# Altium PCB fullCURRENT control.PcbDoc
Units mil, origin at the board's own origin, x right, y up, seen from the top; angles counter-clockwise.
Board outline 1800 x 6000 mil, 2 copper layers (Top Layer, Bottom Layer), stack 62 mil thick; 108 components, 93 nets, 417 pads, 171 vias.
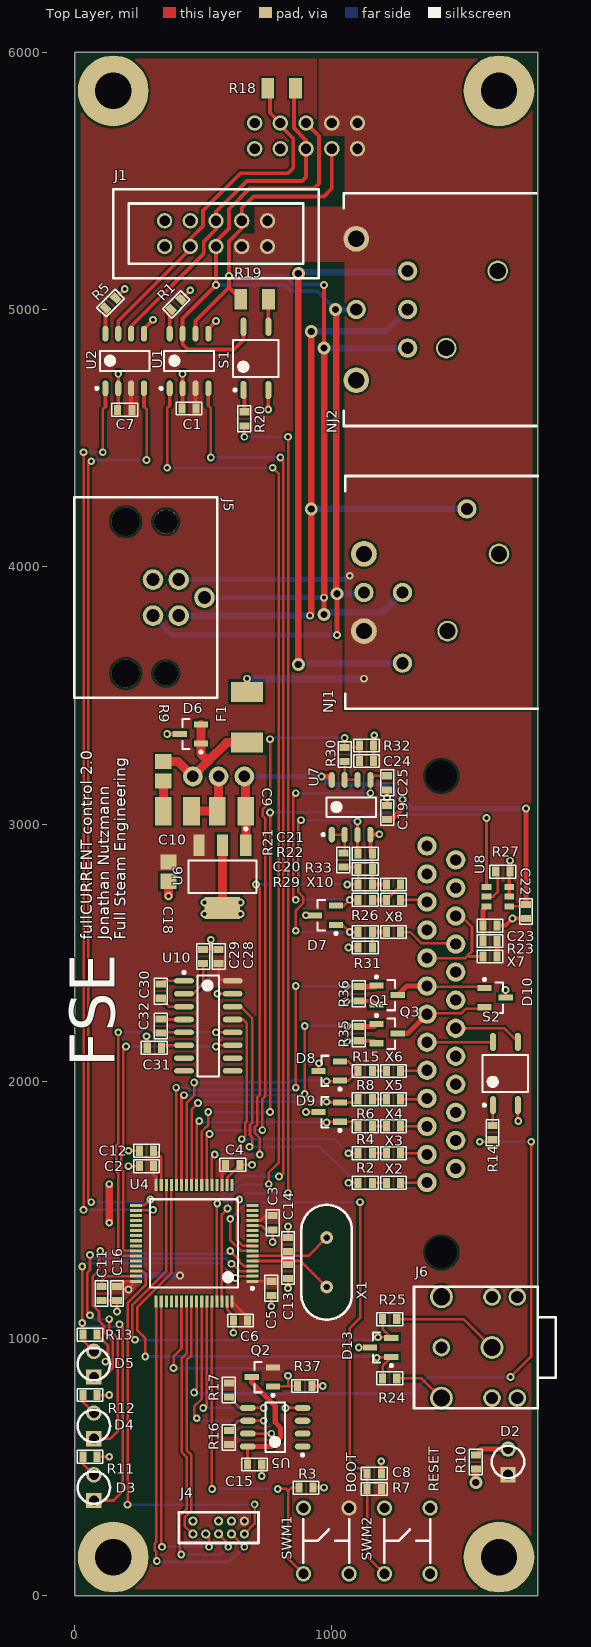
[diagram p0: Top Layer view]
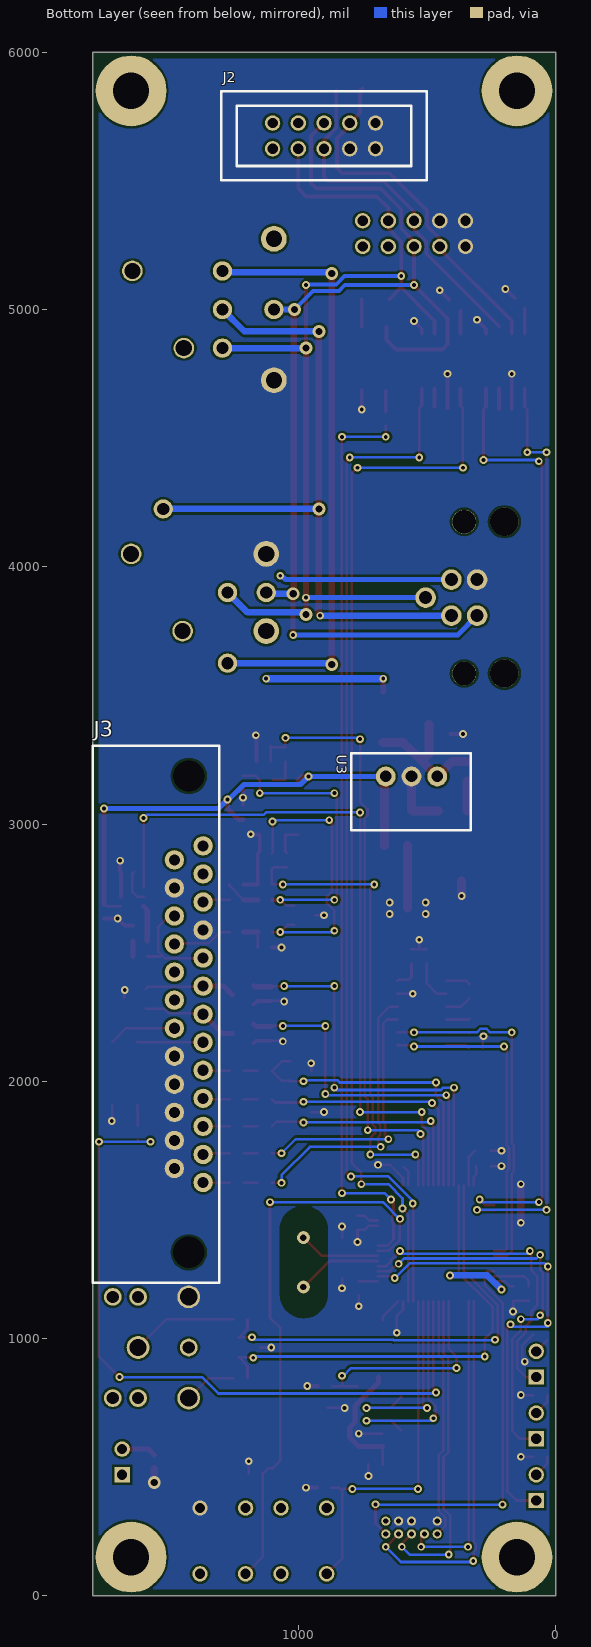
[diagram p1: Bottom Layer view, seen from below]
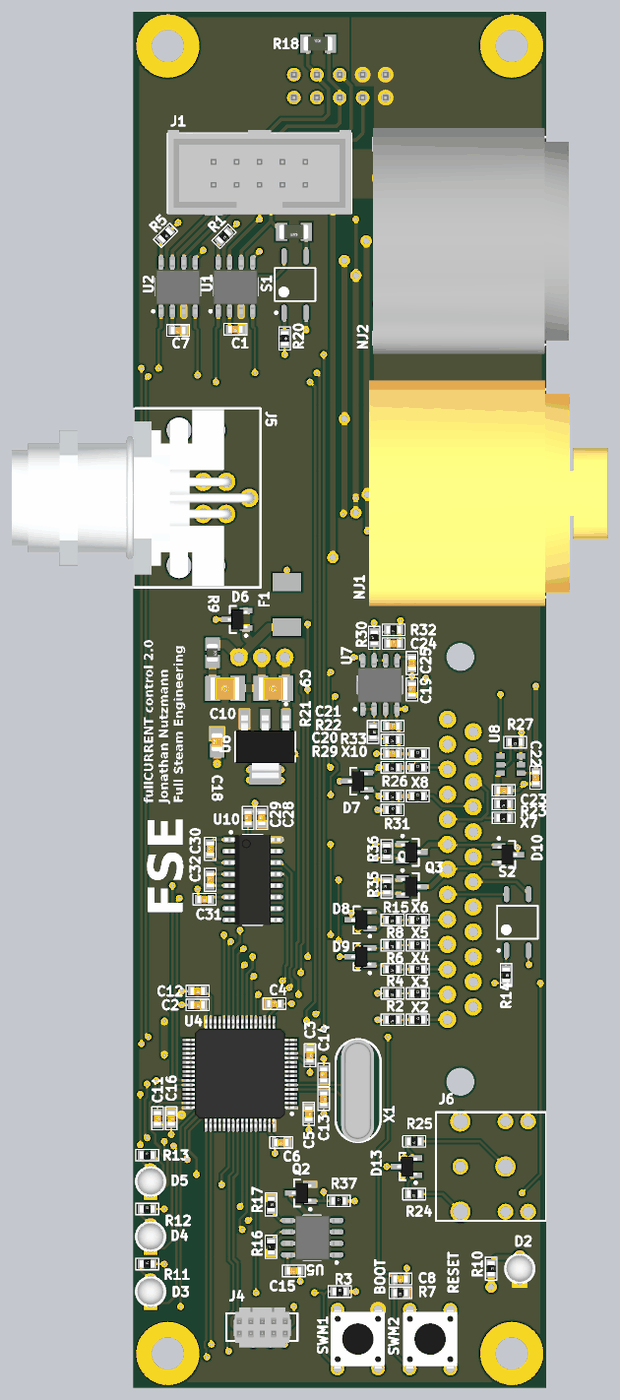
[diagram p2: 3D render of the assembled board from above, using the file's embedded part models]

## Layer stack, top to bottom
Top Layer: signal copper 1.4
Dielectric: core 59.2, FR-4, Dk 4.8
Bottom Layer: signal copper 1.4

## Board outline
0,0 0,6000 1800,6000 1800,0

## Design rules (kind name [scope] priority, off if disabled: settings)
Clearance micro [InComponent('U4')] p1: gap=7
Clearance [All] p2: gap=9
Height [All] p1: minheight=0 maxheight=5000 prefheight=500
HoleSize [All] p1: absolutevalues=TRUE maxlimit=1000 minlimit=1 maxpercent=80.000 minpercent=20.000
MinimumSolderMaskSliver [All] p1: minsoldermaskwidth=3
PolygonConnect vcan [InNet('+VCAN') OR InNet('+3.3V')] p1: connectstyle=Direct reliefconductorwidth=10 reliefentries=4 polygonreliefangle="90 Angle" airgapwidth=10
PolygonConnect [All] p2: connectstyle=Direct reliefconductorwidth=10 reliefentries=4 polygonreliefangle="90 Angle" airgapwidth=10
RoutingVias [All] p1: holewidth=15 width=30 viastyle="Through Hole" minholewidth=15 minwidth=30 maxholewidth=100 maxwidth=50
SilkToSilkClearance [All] p1: silktosilkclearance=0
SilkscreenOverComponentPads [All] p1: minsilkscreentomaskgap=0
SolderMaskExpansion [All] p1: expansion=4
Width [All] p1: maxlimit=1000 minlimit=10 preferedwidth=15
23 further rules are at their usual default settings.

## Components (designator, comment, footprint, x,y, rotation, side; value= is the part's Value field where it differs from the comment)
C1 "CAP 0603" 0603_cap 445,4615 r180 top
C2 "CAP 0603" 0603_cap 280,1670 r180 top
C3 "CAP 0603" 0603_cap 770,1450 r270 top
C4 "CAP 0603" 0603_cap 615,1675 r0 top
C5 "CAP 0603" 0603_cap 765,1195 r270 top
C6 "CAP 0603" 0603_cap 645,1070 r180 top
C7 "CAP 0603" 0603_cap 195,4610 r180 top
C8 "CAP 0603" 0603_cap 1165,475 r180 top
C9 "C_1210_10uF" 1210_Capacitor 610,3050 r0 top
C10 "C_1210_10uF" 1210_Capacitor 400,3050 r0 top
C11 "CAP 0603" 0603_cap 105,1175 r270 top
C12 "CAP 0603" 0603_cap 280,1730 r180 top
C13 "CAP 0603" 0603_cap 830,1260 r270 top
C14 "CAP 0603" 0603_cap 830,1365 r90 top
C15 "CAP 0603" 0603_cap 700,510 r180 top
C16 "CAP 0603" 0603_cap 165,1175 r270 top
C18 "CAP 0805" 0805_Capacitor 365,2815 r90 top
C19 "CAP 0603" 0603_cap 1215,3045 r90 top
C20 "CAP 0603" 0603_cap 1130,2765 r0 top
C21 "CAP 0603" 0603_cap 1130,2885 r0 top
C22 "CAP 0603" 0603_cap 1755,2660 r90 top
C23 "CAP 0603" 0603_cap 1615,2605 r180 top
C24 "CAP 0603" 0603_cap 1135,3245 r0 top
C25 "CAP 0603" 0603_cap 1215,3160 r270 top
C28 "CAP 0603" 0603_cap 560,2485 r90 top
C29 "CAP 0603" 0603_cap 500,2485 r90 top
C30 "CAP 0603" 0603_cap 335,2350 r90 top
C31 "CAP 0603" 0603_cap 310,2130 r180 top
C32 "CAP 0603" 0603_cap 335,2215 r90 top
D2 "3MM GREEN" "LED 3MM GREEN" 1685,520 r90 top
D3 "3MM YELLOW" "LED 3MM BLUE" 75,420 r90 top
D4 "3MM RED" "LED 3MM RED" 75,660 r90 top
D5 "3MM YELLOW" "LED 3MM YELLOW" 75,900 r90 top
D6 "26V" SOT-23 450,3350 r180 top
D7 "5.0V" SOT-23 975,2645 r180 top
D8 "5.0V" SOT-23 990,2040 r180 top
D9 "5.0V" SOT-23 990,1880 r180 top
D10 "26V" SOT-23 1635,2325 r0 top
D13 "3.3V" SOT-23 1190,965 r180 top
F1 "F_2410" 2410 670,3415 r270 top
J1 "J_5x2_0.1" 10PIN_2_.100IN 750,5245 r180 top
J2 "J_5x2_0.1" 10PIN_2_.100IN 1100,5725 r180 bottom
J3 "J_DB25" DB25 1370,2915 r0 bottom locked
J4 "J_CORTEX_DEBUG" CORTEX_DEBUG 660,290 r180 top
J5 "1694224" WFSFDH4.5 355,3880 r270 top
J6 "J_SJ1-3523N" SJ1-3523N 1800,965 r90 top
NJ1 "NC5FBH_D1" NC5FBH 1800,3900 r270 top
NJ2 "NC5MBH_D1" NC5MBH 1795,5000 r270 top
Q1 "Q_IRLML6246TRPBF" SOT-23 1215,2185 r0 top
Q2 "FDN302P" SOT-23 730,850 r180 top
Q3 "Q_IRLML6246TRPBF" SOT-23 1215,2335 r0 top
R1 "RES 0603" 0603_res 395,5020 r225 top
R2 "RES 0603" 0603_res 1130,1605 r180 top
R3 "RES 0603" 0603_res 900,420 r0 top
R4 "RES 0603" 0603_res 1130,1720 r180 top
R5 "RES 0603" 0603_res 140,5025 r225 top
R6 "RES 0603" 0603_res 1130,1825 r180 top
R7 "RES 0603" 0603_res 1165,415 r180 top
R8 "RES 0603" 0603_res 1130,1930 r180 top
R9 "R_0805_1_1%" 0805_Resistor 345,3205 r270 top
R10 "RES 0603" 0603_res 1560,520 r270 top
R11 "RES 0603" 0603_res 60,540 r0 top
R12 "RES 0603" 0603_res 60,780 r0 top
R13 "RES 0603" 0603_res 60,1015 r0 top
R14 "RES 0603" 0603_res 1625,1800 r270 top
R15 "RES 0603" 0603_res 1130,2040 r180 top
R16 "RES 0603" 0603_res 600,615 r90 top
R17 "RES 0603" 0603_res 600,800 r270 top
R18 "RES 1206" 1206_Resistor 805,5860 r0 top
R19 "RES 1206" 1206_Resistor 700,5040 r180 top
R20 "RES 0603" 0603_res 660,4575 r270 top
R21 "RES 0603" 0603_res 1045,2860 r270 top
R22 "RES 0603" 0603_res 1130,2825 r180 top
R23 "RES 0603" 0603_res 1615,2545 r180 top
R24 "RES 0603" 0603_res 1225,845 r180 top
R25 "RES 0603" 0603_res 1225,1075 r180 top
R26 "RES 0603" 0603_res 1130,2580 r180 top
R27 "RES 0603" 0603_res 1665,2815 r180 top
R29 "RES 0603" 0603_res 1130,2705 r180 top
R30 "RES 0603" 0603_res 1050,3270 r90 top
R31 "RES 0603" 0603_res 1130,2520 r0 top
R32 "RES 0603" 0603_res 1135,3305 r180 top
R33 "RES 0603" 0603_res 1240,2765 r0 top
R35 "RES 0603" 0603_res 1105,2185 r90 top
R36 "RES 0603" 0603_res 1105,2340 r90 top
R37 "RES 0603" 0603_res 895,815 r0 top
S1 "S_PS7241E-1A-F3-A" 4SOP-GULL 705,4810 r90 top
S2 "S_PS7241E-1A-F3-A" 4SOP-GULL 1675,2030 r90 top
SWM1 "SW_TACT_SWITCH_6x6" TACT_SWITCH_6x6 890,85 r0 top
SWM2 "SW_TACT_SWITCH_6x6" TACT_SWITCH_6x6 1205,85 r0 top
U1 "U_SN65HVD233D" SOIC127P600X175-8N 445,4800 r90 top
U2 "U_SN65HVD233D" SOIC127P600X175-8N 195,4800 r90 top
U3 "R-783.3-0.5" SIP3 460,3185 r0 bottom
U4 "STM32F405RGT6" STM32_LQFP64 465,1370 r180 top
U5 "MB85RC128PNF-G-JNE1" SOIC127P600X175-8N 780,655 r180 top
U6 "U_MIC2920A-3.3WS" SOT-223 575,2795 r180 top
U7 "IC OP AMP" SOIC127P600X175-8N 1075,3065 r90 top
U8 "NCP380HSNAJAAT1G" tsop-6 1690,2680 r90 top
U10 "U_SN75C3232EDWR" SOIC127P600X175-16N 520,2215 r0 top
X1 "HC49" HC-49 980,1200 r90 top
X2 "0603" 0603_res 1240,1605 r0 top
X3 "0603" 0603_res 1240,1720 r0 top
X4 "0603" 0603_res 1240,1825 r0 top
X5 "0603" 0603_res 1240,1930 r0 top
X6 "0603" 0603_res 1240,2040 r0 top
X7 "0603" 0603_res 1615,2485 r180 top
X8 "0603" 0603_res 1240,2580 r0 top
X10 "0603" 0603_res 1240,2705 r0 top

## Footprints (in the part's own frame and the unit in brackets; to place one, negate y for a bottom-side part, rotate by r counter-clockwise, add the part's x,y. Pads: shape width x height; smd on the part's side, far side on the other; paste and mask are expansions set on the pad)
4SOP-GULL [mm] "SOP, 4-Leads, Body 4.5x4.4mm (max), Pitch 2.45mm, IPC Medium Density"
  oval 1.8x0.6 smd: 1(-3.125,1.225) 2(-3.125,-1.225) 3(3.125,-1.225) 4(3.125,1.225)
  silkscreen extent -3.25,-2.25 1.83,2.25, body extent -2.2,-2.25 2.2,2.25, height 2.1
10PIN_2_.100IN [mil]
  round 60 hole 40.16: 1(0,0) 2(0,-100) 3(100,0) 4(100,-100) 5(200,0) 6(200,-100) 7(300,0) 8(300,-100) 9(400,0) 10(400,-100)
  silkscreen extent -200,-223 600,123, body extent -200,-240 600,133, height 364
0603_cap [mm]
  rect 0.7x1 smd: 1(-0.7,0) 2(0.7,0)
  silkscreen extent -1.27,-0.64 1.27,0.64, body extent -0.8,-0.4 0.8,0.4, height 0.3
0603_res [mm]
  rect 0.7x1 smd: 1(-0.7,0) 2(0.7,0)
  silkscreen extent -1.27,-0.63 1.27,0.63, body extent -0.8,-0.4 0.8,0.4, height 0.3
0805_Capacitor [mm] "0805 Capacitor"
  rect 1.5x1.6 smd: 1(-0.95,0) 2(0.95,0)
  body extent -1,-0.62 1,0.62, height 0.76
0805_Resistor [mm] "0805 Resistor"
  rect 1.5x1.6 smd: 1(-0.95,0) 2(0.95,0)
  body extent -1,-0.62 1,0.63, height 0.78
1206_Resistor [mm] "1206 Resistor/Capacitor"
  rect 1.25x2 smd: 1(-1.375,0) 2(1.375,0)
  body extent -1.6,-0.8 1.6,0.8, height 1
1210_Capacitor [mil] "1210 Capacitor"
  rect 65x110 smd: 1(-55,0) 2(55,0)
  body extent -84,-54 82,52, height 36
2410 [mm]
  rect 2x3.18 smd: 1(-2.5,0) 2(2.5,0)
CORTEX_DEBUG [mm]
  round 0.9 hole 0.5: 1(0,0) 2(0,1.27) 3(1.27,0) 4(1.27,1.27) 5(2.54,0) 6(2.54,1.27) 8(3.81,1.27) 9(5.08,0) 10(5.08,1.27)
  silkscreen extent -1.4,-0.89 6.48,2.16, body extent -0.69,-1.55 5.66,2.9, height 5.85
DB25 [mm]
  round 1.524 hole 3.1 unplated: 0(1.42,-6.9) 0(1.42,40.14)
  round 1.905 hole 1.1: 1(0,33.24) 2(0,30.47) 3(0,27.7) 4(0,24.93) 5(0,22.16) 6(0,19.39) 7(0,16.62) 8(0,13.85) 9(0,11.08) 10(0,8.31) 11(0,5.54) 12(0,2.77) 13(0,0) 14(2.84,31.855) 15(2.84,29.085) 16(2.84,26.315) 17(2.84,23.545) 18(2.84,20.775) 19(2.84,18.005) 20(2.84,15.235) 21(2.84,12.465) 22(2.84,9.695) 23(2.84,6.925) 24(2.84,4.155) 25(2.84,1.385)
  silkscreen extent -1.58,-9.9 10.92,43.14
HC-49 [mm]
  round 1.27 hole 0.635: 1(0,0) 2(4.88,0)
  Top Layer pour cut-out: -2.591,1.499 -2.388,1.727 -2.235,1.854 -1.981,2.057 -1.727,2.184 -1.448,2.311 -1.067,2.388 -0.787,2.413 5.766,2.413 6.172,2.337 6.579,2.21 6.909,2.032 7.239,1.778 7.595,1.372 7.849,0.914 7.976,0.533 8.026,0.127 8.026,-0.178 7.95,-0.559 7.772,-0.991 7.569,-1.346 7.188,-1.778 6.858,-2.007 6.375,-2.235 6.02,-2.311 5.588,-2.362 -0.686,-2.362 -1.016,-2.337 -1.27,-2.286 -1.502,-2.216 -1.753,-2.108 -2.007,-1.981 -2.21,-1.829 -2.438,-1.6 -2.642,-1.346 -2.87,-1.016 -2.997,-0.66 -3.073,-0.279 -3.099,0.025 -3.073,0.33 -3.023,0.584 -2.946,0.889 -2.819,1.118 -2.718,1.295
  Bottom Layer pour cut-out: 7.518,1.499 7.315,1.727 7.163,1.854 6.909,2.057 6.655,2.184 6.375,2.311 5.994,2.388 5.715,2.413 -0.838,2.413 -1.245,2.337 -1.651,2.21 -1.981,2.032 -2.311,1.778 -2.667,1.372 -2.921,0.914 -3.048,0.533 -3.099,0.127 -3.099,-0.178 -3.023,-0.559 -2.845,-0.991 -2.642,-1.346 -2.261,-1.778 -1.93,-2.007 -1.448,-2.235 -1.092,-2.311 -0.66,-2.362 5.613,-2.362 5.944,-2.337 6.198,-2.286 6.43,-2.216 6.68,-2.108 6.934,-1.981 7.137,-1.829 7.366,-1.6 7.569,-1.346 7.798,-1.016 7.925,-0.66 8.001,-0.279 8.026,0.025 8.001,0.33 7.95,0.584 7.874,0.889 7.747,1.118 7.645,1.295
  silkscreen extent -3.23,-2.5 8.11,2.5, body extent -3.25,-1.78 8.1,1.87, height 3.3
"LED 3MM BLUE" [mil] "LED 3MM GREEN"
  rect 59.06x60 hole 39.37: A(-50,0)
  round 60 hole 39.37: K(50,0)
  silkscreen extent -63,-63 63,63, body extent -65,-65 65,65, height 217
"LED 3MM GREEN" [mil] "LED 3MM GREEN"
  rect 59.06x60 hole 39.37: A(-50,0)
  round 60 hole 39.37: K(50,0)
  silkscreen extent -63,-63 63,63, body extent -65,-65 65,65, height 217
"LED 3MM RED" [mil] "LED 3MM RED"
  rect 59.06x60 hole 39.37: A(-50,0)
  round 60 hole 39.37: K(50,0)
  silkscreen extent -63,-63 63,63, body extent -65,-65 65,65, height 217
"LED 3MM YELLOW" [mil] "LED 3MM YELLOW"
  rect 59.06x60 hole 39.37: A(-50,0)
  round 60 hole 39.37: K(50,0)
  silkscreen extent -63,-63 63,63, body extent -65,-65 65,65, height 217
NC5FBH [mm] "XLR Female"
  round 2.54 hole 1.6: 1(-3.81,-17.15) 5(3.81,-17.15)
  round 1.905 hole 1.2: 2(0,-13.335) 3(0,-17.15) 4(6.98,-13.335)
  round 1.9 hole 1.2: 6(-8.25,-6.98)
  round 2.032 hole 1.6: 7(-3.81,-3.81) 8(3.81,-8.89)
  silkscreen extent -11.5,-19 11.5,0, body extent -12.49,-19.6 12.5,6.8, height 29.27
NC5MBH [mil] "XLR 5 Female"
  round 100 hole 63: 1(274.8,-700) 5(-274.8,-700)
  round 75 hole 47.24: 2(150,-500) 3(0,-700) 4(-150,-500) 6(0,-500)
  round 80 hole 63: 7(-150,-150) 8(150,-350)
  silkscreen extent -453,-748 453,0, body extent -492,-750 492,104, height 992
SIP3 [mm]
  oval 1.95x1.96 hole 1.15: 1(0,0) 2(2.54,0) 3(5.08,0)
  silkscreen extent -3.3,-2.29 8.51,5.33
SJ1-3523N [mm]
  round 1.75 hole 1.2: 0(-5,2) 0(-5,4.5) 0(0,9.5) 0(5,2) 0(5,4.5)
  round 2.25 hole 1.7: GND(5,9.5) uRX(0,4.5) uTX(-5,9.5)
  silkscreen extent -6,-1.8 6,12.2
SOIC127P600X175-8N [mm] "SOIC, 8-Leads, Body 4.9x3.9mm (max), Pitch 1.27mm, IPC Medium Density"
  oval 1.55x0.6 smd: 1(-2.7,1.905) 2(-2.7,0.635) 3(-2.7,-0.635) 4(-2.7,-1.905) 5(2.7,-1.905) 6(2.7,-0.635) 7(2.7,0.635) 8(2.7,1.905)
  silkscreen extent -2.82,-2.45 0.97,2.88, body extent -3.02,-2.46 2.98,2.48, height 1.55
SOIC127P600X175-16N [mm] "SOIC, 16-Leads, Body 10.0x4.0mm (max), Pitch 1.27mm, IPC Medium Density"
  oval 1.95x0.55 smd: 1(-2.4,4.445) 2(-2.4,3.175) 3(-2.4,1.905) 4(-2.4,0.635) 5(-2.4,-0.635) 6(-2.4,-1.905) 7(-2.4,-3.175) 8(-2.4,-4.445) 9(2.4,-4.445) 10(2.4,-3.175) 11(2.4,-1.905) 12(2.4,-0.635) 13(2.4,0.635) 14(2.4,1.905) 15(2.4,3.175) 16(2.4,4.445)
  silkscreen extent -2.52,-5 1.07,5.39, body extent -3.1,-5 3.1,5, height 1.7
SOT-23 [mm] "SOT23, 3-Leads, Body 3.0x2.7mm (max), Pitch 0.95mm, IPC Medium Density"
  rect 1.4x0.6 smd: 1(-1.05,0.95) 2(-1.05,-0.95) 3(1.05,0)
  silkscreen extent -1.18,-1.5 0.76,1.92, body extent -1.21,-1.1 0.99,1.1, height 1.1
SOT-223 [mm] "SOT-223/SC-73; 4 Leads; Body 6.7 x 7.3 mm, inc. leads (LxW max)"
  rect 1.1x2.15 smd: 1(-2.3,-3.1) 2(0,-3.1) 3(2.3,-3.1)
  rect 3.5x2.15 smd: 4(0,3.1)
  silkscreen extent -3.35,-4.85 3.35,1.63, body extent -3.25,-3.48 3.25,3.48, height 1.65
STM32_LQFP64 [mm] "TSQFP, 64-Leads, Body 12.0x12.0mm (max), Pitch 0.50mm, IPC Medium Density"
  rect 1.2x0.3 smd: 1(-5.75,3.75) 2(-5.75,3.25) 3(-5.75,2.75) 4(-5.75,2.25) 5(-5.75,1.75) 6(-5.75,1.25) 7(-5.75,0.75) 8(-5.75,0.25) 9(-5.75,-0.25) 10(-5.75,-0.75) 11(-5.75,-1.25) 12(-5.75,-1.75) 13(-5.75,-2.25) 14(-5.75,-2.75) 15(-5.75,-3.25) 16(-5.75,-3.75) 33(5.75,-3.75) 34(5.75,-3.25) 35(5.75,-2.75) 36(5.75,-2.25) 37(5.75,-1.75) 38(5.75,-1.25) 39(5.75,-0.75) 40(5.75,-0.25) 41(5.75,0.25) 42(5.75,0.75) 43(5.75,1.25) 44(5.75,1.75) 45(5.75,2.25) 46(5.75,2.75) 47(5.75,3.25) 48(5.75,3.75)
  rect 0.3x1.2 smd: 17(-3.75,-5.75) 18(-3.25,-5.75) 19(-2.75,-5.75) 20(-2.25,-5.75) 21(-1.75,-5.75) 22(-1.25,-5.75) 23(-0.75,-5.75) 24(-0.25,-5.75) 25(0.25,-5.75) 26(0.75,-5.75) 27(1.25,-5.75) 28(1.75,-5.75) 29(2.25,-5.75) 30(2.75,-5.75) 31(3.25,-5.75) 32(3.75,-5.75) 49(3.75,5.75) 50(3.25,5.75) 51(2.75,5.75) 52(2.25,5.75) 53(1.75,5.75) 54(1.25,5.75) 55(0.75,5.75) 56(0.25,5.75) 57(-0.25,5.75) 58(-0.75,5.75) 59(-1.25,5.75) 60(-1.75,5.75) 61(-2.25,5.75) 62(-2.75,5.75) 63(-3.25,5.75) 64(-3.75,5.75)
  silkscreen extent -5.88,-4.35 4.35,4.57, body extent -5.99,-6 6.01,6, height 1.6
TACT_SWITCH_6x6 [mil]
  round 60 hole 40: 1(0,0) 2(177.17,255.91) 3(177.17,0) 4(0,255.91)
  silkscreen extent -1,43 179,213, body extent -29,0 207,255, height 169
tsop-6 [mm]
  rect 0.6x0.95 smd: 1(0,0) 2(0.95,0) 3(1.9,0) 4(1.9,2.25) 5(0.95,2.25) 6(0,2.25)
WFSFDH4.5 [mil]
  round 80 hole 50: 1(70,50) 2(-70,50) 3(-70,-50) 4(70,-50) 5(0,150)
  round 110 hole 110 unplated: 6(295,-156) 9(-295,-156)
  round 93 hole 93 unplated: 7(295,0) 8(-295,0)
  silkscreen extent -390,-356 390,200, body extent -394,-885 394,170, height 630

## Part data
C1 C2 C3 C4 C5 C6 C7 C8 C15 C16 C19 C20 C22 C23 C24 C28 C29 C30 C31 C32: library part C_0603, "CAP CERM 0.1uF 0603 X7R"
C9 C10: "CAP CER 10UF 50V 10% X5R 1210"
C11 C12: library part C_0603, "CAP CER 2.2UF 10V 10% X7R 0603"
C13 C14: library part C_0603, "CAP CER 22PF 50V 5% NPO 0603"
C18: library part C_0805, "CAP CERM 0805"
C21 C25: library part C_0603, "CAP CERM 0.01uF 0603 X7R"
D2: library part "D_LED 3MM GREEN", "LED 3MM GREEN"
D3: library part "D_LED 3MM BLUE", "LED 3MM BLUE"
D4: library part "D_LED 3MM RED", "LED 3MM RED"
D5: library part "D_LED 3MM YELLOW", "LED 3MM YELLOW"
D6 D10: library part D_TVS_12V
D7 D8 D9: library part D_TVS_5, "5.0V TVS SOT23"
D13: library part D_TVS_5, "3.3V TVS SOT23"
F1: "FUSE 2410"
J1 J2: "5 x 2 0.1\" Header"
J4: "CORTEX JTAG DEBUG CONNECTOR"
J5: library part "Header 5", "CONNECTOR, 5-pos., M12, A-coded"
J6: "CONN JACK STEREO R/A 3PIN 3.5MM"
NJ1 NJ2: "D1 Bus Connector"
Q1 Q3: "MOSFET N-CH 20V 4.1A SOT-23"
Q2: library part Q_FDN302P, "MOSFET P-CH 20V 2.4A SSOT3"
R1 R5: library part R_0603, "RES 10K 1% 0603"
R2 R4 R6 R8 R15 R23 R24 R25 R26 R29: library part R_0603, "RES 100 0603 1%"
R3 R7: library part R_0603, "RES 100K 1% 0603"
R9: "RES 1 OHM 1/8W 1% 0805 SMD"
R10 R11 R12 R13: library part R_0603, "RES 300 1% 0603"
R14 R20: library part R_0603, "RES 220 0603 1%"
R16 R17: library part R_0603, "RES 5.1K 1% 0603"
R18 R19: library part R_1206, "RES 120 1206 1%"
R21 R22 R27 R30 R32 R35 R36: library part R_0603
R31 R33: library part R_0603, "RES 100k 0603 1%"
R37: library part R_0603, "RES 10K 0603 1%"
S1 S2: "SSR OCMOS FET 120MA 1CH NO 4-SOP"
SWM1 SWM2: "SWITCH TACTILE SPST-NO 0.05A 12V"
U1 U2: "IC 3.3V CAN TXRX 8-SOIC"
U3: library part U_R-783.3-0.5, "IC REG 0.5A 3.3V"
U4: library part U_STM32F405RGT6, "IC MCU 32BIT 1MB FLASH 64LQFP"
U5: library part U_MB85RC16PNF-G-JNE1, "IC FRAM 128KBIT 400KHZ 8SOP"
U6: "IC REG LDO 3.3V .4A SOT223"
U7: library part U_MCP6042T-I/SN, "IC OPAMP 1UA 1.4V DUAL R-R 8SOIC"
U8: library part U_NCP380HSNAJAAT1G, "IC CURRENT LIMIT SWITCH 6-TSOP"
U10: "IC LINE DRVR/RCVR RS232 16-SOIC"
X1: library part X_HC49, "CRYSTAL 8.0 MHZ 20PF"
X2 X3 X4 X5 X6 X7 X8 X10: library part X_0603_FERRITE, "FERRITE 0603"

## Free pads (board coordinates)
  round 275 hole 141: 0(150,150) 0(150,5850) 0(1650,150) 0(1650,5850)

## Via types
v1: diameter 30, hole 15, Top Layer to Bottom Layer, 162 vias
v2: diameter 50, hole 28, Top Layer to Bottom Layer, 9 vias

## Nets (pads, with @x,y where several pads share a name; then routed paths per layer and width w, separated by ;. In a path a pad name is that pad's centre, name@x,y a point inside that pad or via, vN(x,y) a via of type N, cw(c..) or ccw(c..) an arc to the next point about the centre after c; other vN are vias at no path point)
+3.3V: C1.1 C2.1 C3.1 C4.1 C5.1 C6.1 C7.1 C16.1 C18.2 C28.1 D2.A J4.1 Q2.2 R7.1 R16.1 R17.1 SWM1.2 U1.3 U2.3 U4.1 U4.13 U4.19 U4.32 U4.48 U4.64 U6.3 U10.16 | length 1014.4
  Top Layer w10: C16.1 177.56,1202.56 194.37,1219.37 ; 197.36,1222.36 U4.48 216.64,1200.38 213.36,1200.38 v1@213.36,1196.64 ; C2.1 307.56,1637.44 317.36,1627.64 U4.32 ; C28.1 560,2405 570,2395 609.49,2395 U10.16 ; U4.19 573.27,1650.83 C4.1@587.44,1665 ; U4.64 672.56,1083.7 C6.1 ; U4.1 C5.1@764.8,1222.36 ; U4.13 723.58,1458.58 742.56,1477.56 C3.1
  Top Layer w15: C7.1@220,4612.56 U2.3 ; C1.1@470,4622.56 U1.3
  Bottom Layer w25: v1(210,1190) 265,1245 v1(410,1245)
+3.3V_FRAM: C15.2 Q2.3 U5.8 | length 492.4
  Top Layer w10: C15.2 672.44,578.74 U5.8
  Top Layer w20: U5.8 765,580 800,615 800,654 780,674 780,737.7 688.66,829.04 Q2.3
+5THROTTLE_FAULT: U4.23 U8.4 | length 2818.8
  Top Layer w10: U4.23 494.53,1805.54 512.99,1824 514,1824 520,1830 v1(520,1880) ; v1(760,1880) v1(760,3045) ; U8.4 v1(1601.42,3023.58)
  Bottom Layer w10: v1(520,1880) v1(760,1880) ; v1(760,3045) 1125,3045 1134,3036 1589,3036 v1(1601.42,3023.58)
+5V: C9.2 C19.1 C22.2 U3.3 U6.1 U7.8 U8.1 | length 2015.1
  Top Layer w10: U8.1 1742.56,2680 C22.2@1755,2692.44
  Top Layer w20: v1(960,3185) 986.3,3185 U7.8 ; C19.1 1232.44,3017.44 1275,3060 v1(1275,3095) ; C22.2 1755,2692.44 v1(1755,3060)
  Top Layer w35: U3.3 665,3180 C9.2 ; U6.1 C9.2@665.55,3049.45
  Bottom Layer w20: U3.3 v1(960,3185) 991,3154 1211.58,3154 1265.58,3100 v1@1275,3100 ; v1(1275,3095) 1310,3060 v1(1755,3060)
+5V_THROTTLE: C23.2 R23.2 U8.6 | length 140.8
  Top Layer w20: R23.2 C23.2 1587.44,2666.02 U8.6
+VCAN: F1.1 J1.1 J1.2 J1.3 J2.1 J2.2 J2.3 J5.2 NJ1.5 NJ2.5 | length 1184.9
  Top Layer w20: F1.1 v1(670,3565)
  Bottom Layer w20: J5.2 1050,3950 1070,3970 v1(1070,3965)
  Bottom Layer w30: v1(670,3565) v1(1125,3565)
BL_EN: R3.1 SWM1.1 U4.60 | length 1432.1
  Top Layer w10: U4.60 533.9,416.1 v1(535,415) ; v1(790,415) 822.44,415 830,407.44 ; R3.1 842.56,420 830,407.44 ; SWM1.1 830,145 830,407.44
  Bottom Layer w10: v1(535,415) v1(790,415) v1@800,415
BRAKE: D10.2 J3.7 Q1.3 | length 377.7
  Top Layer w10: J3.7 1373.03,2263.7 1503.14,2263.7 1522.04,2282.6 D10.2@1593.66,2282.6
  Top Layer w20: Q1.3 1294.33,2185 J3.7
BRAKE_UC: Q1.1 R35.2 U4.27 | length 1379.6
  Top Layer w10: U4.27 415.79,1944.32 415.1,1945 416.1,1946 v1(425.1,1946) ; v1(895,1950) v1(895,2215) ; v1(1060,2215) 1102.56,2215 R35.2
  Top Layer w20: R35.2 1163.82,2212.56 Q1.1
  Bottom Layer w10: v1(425.1,1946) 891,1946 v1(895,1950) ; v1(895,2215) v1(1060,2215)
DBUG_RX: D13.2 R25.2 U4.30 | length 1745.9
  Top Layer w10: v1(235,995) 225,1005 225,1130 356.73,1261.73 U4.30 ; v1(1180,1005) D13.2@1228.74,1005 ; R25.2 1197.44,1036.3 D13.2@1228.74,1005 ; D13.2 D13.2@1228.74,1005
  Bottom Layer w10: v1(235,995) 236.56,993.44 629.45,993.44 631.01,995 1170,995 v1(1180,1005)
DBUG_TX: D13.1 R24.2 U4.29 | length 1793.1
  Top Layer w10: v1(275,930) 275,1000 244,1031 244,1122.13 376.42,1254.55 U4.29 ; v1(1175,925) 1177.6,927.6 D13.1 1197.44,893.7 R24.2
  Bottom Layer w10: v1(275,930) 1175,930 v1(1175,925)
ENABLE: D9.1 R6.2 U4.24 | length 880.7
  Top Layer w10: U4.24 474.84,1834.84 v1(485,1845) ; v1(980,1840) 982.6,1842.6 D9.1 1084.84,1842.6 R6.2
  Bottom Layer w10: v1(485,1845) 490,1840 v1(980,1840)
FOR/REV!: D8.1 D8.2 R15.2 U4.26 | length 1161.8
  Top Layer w10: U4.26 435.47,1915.36 465,1944.89 v1(465,1995) ; v1(980,2000) 1028.74,2000 D8.1 1065.04,2002.6 R15.2 1065.04,2077.4 D8.2
  Bottom Layer w10: v1@460,1995 838.99,1995 847.99,2004 976,2004 v1(980,2000)
FRAM_PWR: Q2.1 R37.1 U4.54 | length 865.9
  Top Layer w10: v1(385,885) 385,930 415.79,960.79 U4.54 ; Q2.1 773.74,815 830,815 ; v1(830,855) 830,815 ; R37.1 830,815
  Bottom Layer w10: v1(385,885) 795,885 825,855 v1(830,855)
GCANH: J1.5 J2.5 J5.4 NJ1.3 NJ2.3 S1.4 U1.7 | length 4255.5
  Top Layer w15: S1.4 656.77,4881.77 620,4845 440,4845 420,4865 U1.7 420,4965 v1(550,5095) J1.5 550,5265 600,5315 600,5390 680,5470 930,5470 950,5490 950,5675 J2.5
  Top Layer w20: v1(1020,3735) v2(1020,3895)
  Top Layer w25: v2(1015,5000) 1017.5,4997.5 1017.5,3897.5 v2(1020,3895)
  Bottom Layer w15: v1(550,5095) 819.54,5095 842.04,5072.5 942.5,5072.5 v2(1015,5000)
  Bottom Layer w20: J5.4 380,3735 v1(1020,3735)
  Bottom Layer w25: v2(1015,5000) NJ2.3 ; v2(1020,3895) NJ1.3@1119.8,3895
GCANL: J1.4 J2.4 J5.5 NJ1.2 NJ2.2 R19.2 U1.6 | length 3957.7
  Top Layer w15: U1.6 470,4955 600,5085 v1(600,5130) 600,5265 650,5315 J1.4 650,5395 695,5440 970,5440 1000,5470 J2.4 ; 600.87,5085 R19.2 ; v2(970,4850) v1(970,5095)
  Top Layer w20: v2(970,3815) v1(970,3880)
  Top Layer w25: v1(970,3880) v2(970,4850)
  Bottom Layer w15: v1(600,5130) 819.9,5130 852.4,5097.5 967.5,5097.5 v1(970,5095)
  Bottom Layer w20: J5.5 v1(970,3880)
  Bottom Layer w25: v2(970,3815) 977.5,3822.5 1197.5,3822.5 NJ1.2 ; v2(970,4850) NJ2.2
GND: C1.2 C2.2 C3.2 C4.2 C5.2 C6.2 C7.2 C8.1 C9.1 C10.2 C11.2 C12.2 C13.2 C14.2 C15.1 C16.2 C18.1 C19.2 C20.2 C21.2 C22.1 C23.1 C24.2 C25.2 C28.2 C29.2 C31.2 D6.3 D7.3 D8.3 D9.3 D10.3 D13.3 J1.8 J1.9 J1.10 J2.8 J2.9 J2.10 J3.10 J3.14 J3.15 J3.16 J3.17 J3.18 J3.24 J4.3 J4.5 J4.9 J5.3 J6.GND NJ1.1 NJ2.1 Q1.2 Q3.2 R1.1 R3.2 R5.1 R10.2 R11.2 R12.2 R13.2 R22.1 R27.1 R31.1 R32.1 R33.1 R35.1 R36.1 R37.2 S1.2 S2.2 SWM2.2 U1.2 U1.5 U2.2 U2.5 U3.2 U4.12 U4.18 U4.63 U5.4 U5.7 U6.2 U6.4 U7.4 U8.2 U8.3 U10.15 | length 4098.8
  Top Layer w10: R11.2 v1(135,540) ; R12.2 v1(135,780) ; R13.2 130,972.56 130,920 v1(120,910) ; C11.2 C16.2 v1(165,1105) ; v1(210,1670) C2.2 ; v1(210,1730) C12.2 ; v1(280,2175) 282.44,2172.56 C31.2 ; C29.2 530,2512.56 ; v1(530,2550) 530,2512.56 ; v1(555,2340) U10.15 ; C28.2 530,2512.56 ; U4.63 592.95,1112.05 617.44,1087.56 C6.2 v1(617.44,1022.44) ; U4.18 592.95,1624.27 642.56,1673.87 C4.2 v1(690,1675) ; U5.7 v1(765,630) ; U4.12 726.1,1438.9 742.56,1422.44 C3.2 v1(770,1375) ; v1@727.56,457.44 C15.1 ; v1(765,1125) C5.2 ; v1(820,730) U5.4 ; v1(830,1195) C13.2 ; C14.2 v1(830,1435) ; v1(900,1880) D9.3 ; v1(900,2645) D7.3 ; D8.3 948.66,2068.66 v1(950,2070) ; v1(1055,2310) 1057.44,2312.44 R36.1 ; v1(1060,2155) 1062.44,2157.44 R35.1 ; v1(1105,965) D13.3 ; C8.1 v1(1192.56,522.56) ; C19.2 v1(1215,3102.5) ; v1(1675,2355) 1676.34,2353.66 D10.3 ; S2.2 1723.23,1846.77 v1(1725,1845)
  Top Layer w15: R5.1 v1(195,5080) ; C7.2@170,4612.56 U2.2 v1(170,4750) ; U2.5 270,4925 v1(305,4960) ; v1(360,3350) D6.3 ; R1.1 v1(450,5075) ; C1.2@420,4617.44 U1.2 v1(420,4750) ; U1.5 520,4925 v1(550,4955) ; v1(753.23,4611.77) S1.2 ; R37.2 v1(965,815) ; R3.2 v1(970,420) ; v1(1065,2520) R31.1 ; R35.1 1163.82,2157.44 Q1.2 ; R36.1 1158.82,2312.44 Q3.2 ; C24.2 R32.1 1162.56,3342.56 v1(1165,3345) ; v1(1185,2960) 1183.7,2958.7 U7.4 1150,2892.56 C21.2 R22.1 C20.2 R33.1 ; v1(1215,3102.5) C25.2 ; C23.1 1675,2605 v1(1702.44,2632.44) C22.1 ; U8.2 U8.3 R27.1@1690,2812.44 ; R27.1 v1(1692.56,2857.56)
  Top Layer w30: v1(135,1450) v1(135,1600) ; v2(1560,440) R10.2
  Top Layer w35: v1(365,2720) C18.1 ; C10.2 C9.1 560,3055 U3.2 ; U6.4 U6.2
  Bottom Layer w10: v1(135,1450) v1@135,1455
  other v1: 727.56,465 505,2650 645,2650 505,2695 645,2695
JSWCLK: J4.4 U4.49 | length 1471.7
  Top Layer w10: v1@315,135 312,135 317.36,140.36 317.36,171.63 311,177.99 311,202.01 317.36,208.37 U4.49 ; J4.4 v1(660,190) v1@667.6,182.4
  Bottom Layer w10: v1@315,135 319,131 601,131 v1(660,190)
  other v1: 320,135
JSWDIO: J4.2 U4.46 | length 1593.9
  Top Layer w10: v1(206,354) 206,1137.87 276,1207.87 276,1251.17 265.44,1261.73 U4.46 ; J4.2 700,280 v1(700,355)
  Bottom Layer w10: v1(206,354) 699,354 v1(700,355)
JTDI: J4.8 U4.50 | length 1188.5
  Top Layer w10: v1@337.05,192.95 U4.50 ; J4.8 522.6,227.4 v1(522.6,190)
  Bottom Layer w10: v1(340,190) v1(522.6,190)
JTDO: J4.6 U4.55 | length 1264.4
  Top Layer w10: v1@409.28,165.72 409.28,311.01 435.47,337.2 435.47,538.8 417,557.28 417,923.54 435.47,942.02 U4.55 ; J4.6 597.4,202.6 v1(597.4,190)
  Bottom Layer w10: v1(415,160) 567.4,160 v1(597.4,190)
LCANH: J1.7 J2.7 R18.1 U2.7 | length 1384.8
  Top Layer w15: U2.7 170,4955 450,5235 J1.7 450,5275 500,5325 500,5385 645,5530 830,5530 850,5550 850,5665 800,5715 J2.7 760,5765 760,5850.87 R18.1
LCANL: J1.6 J2.6 R18.2 U2.6 | length 1343.9
  Top Layer w15: U2.6@220,4935 502.5,5217.5 502.5,5264.68 550,5312.18 J1.6 550,5380 670,5500 885,5500 900,5515 J2.6 900,5657.82 852.5,5705.32 R18.2@852.5,5851.63
LED1: D3.A U4.2 | length 1841.5
  Top Layer w10: v1(30,1060) v1(30,1280) ; D3.A 152,370 187,405 187,1043 v1(175,1055) ; v1(625,1235) 632.05,1242.05 U4.2
  Bottom Layer w10: v1(30,1060) 30,1045 165,1045 v1(175,1055) ; 42,1292 566.99,1292 623.99,1235 v1(625,1235)
LED2: D4.A U4.3 | length 1539.1
  Top Layer w10: v1(60,1090) 50,1100 50,1256.25 60,1266.25 v1(60,1325) ; D4.A 138,610 168,640 168,998.87 135,1031.87 v1(135,1075) ; v1(610,1290) 615,1290 643.27,1261.73 U4.3
  Bottom Layer w10: v1(60,1090) 60,1085 70,1075 v1(135,1075) ; v1(60,1325) 74,1311 589,1311 v1(610,1290)
LED3: D5.A U4.4 | length 1200.3
  Top Layer w10: D5.A 114,850 149,885 149,991 115.34,1024.66 115.34,1048.69 95,1069.02 95,1104.18 71.31,1127.86 71.31,1241.87 95,1265.56 95,1335 v1(100,1340) ; v1(605,1340) 640,1305 640,1300 658.58,1281.42 U4.4
  Bottom Layer w10: v1@110,1330 595,1330 v1(605,1340)
NetC10_1: C10.1 R9.2 | length 117.6
  Top Layer w35: C10.1 R9.2
NetC29_1: C29.1 U10.2 | length 168.5
  Top Layer w10: U10.2 460,2340 500,2380 C29.1
NetC30_1: C30.1 U10.3 | length 103.9
  Top Layer w10: C30.1 367.44,2290 U10.3
NetC30_2: C30.2 U10.1 | length 95.7
  Top Layer w10: C30.2 347.44,2390 U10.1
NetC31_1: C31.1 U10.6 | length 92.1
  Top Layer w10: C31.1 347.56,2140 U10.6
NetC32_1: C32.1 U10.5 | length 91.6
  Top Layer w10: C32.1 337.56,2190 U10.5
NetC32_2: C32.2 U10.4 | length 91.6
  Top Layer w10: C32.2 337.56,2240 U10.4
NetD2_K: D2.K R10.1 | length 134.3
  Top Layer w20: R10.1 1582.44,570 D2.K
NetD3_K: D3.K R11.1 | length 87.6
  Top Layer w10: R11.1 32.44,512.56 D3.K
NetD4_K: D4.K R12.1 | length 87.6
  Top Layer w10: R12.1 32.44,752.56 D4.K
NetD5_K: D5.K R13.1 | length 60.2
  Top Layer w10: 32.44,992.56 D5.K
NetD6_1: D6.1 D6.2 F1.2 R9.1 U3.1 | length 557.5
  Top Layer w35: R9.1 402.6,3242.4 U3.1 520,3245 ; D6.2 D6.1 491.34,3273.66 520,3245 ; F1.2 591.57,3316.57 520,3245
NetJ3_1: J3.1 X2.2 | length 103
  Top Layer w10: X2.2 1368.66,1605 J3.1
NetJ3_2: J3.2 X3.2 | length 104.3
  Top Layer w10: X3.2 1365.39,1720 J3.2
NetJ3_3: J3.3 X4.2 | length 102.7
  Top Layer w10: X4.2 1369.45,1825 J3.3
NetJ3_4: J3.4 X5.2 | length 103.9
  Top Layer w10: X5.2 1366.5,1930 J3.4
NetJ3_5: J3.5 X6.2 | length 103.5
  Top Layer w10: X6.2 1367.44,2040 J3.5
NetJ3_6: J3.6 S2.4 | length 257.4
  Top Layer w10: J3.6 1625.35,2151.61 S2.4
NetJ3_9: J3.9 J3.23 X7.2 | length 422.5
  Top Layer w10: J3.9 1518.78,2478.78 1530,2490 ; J3.23@1479.45,2640 1505,2640 1545,2600 1545,2505 1530,2490 ; X7.2 1535,2485 1530,2490
NetJ3_11: J3.11 X10.2 | length 105.8
  Top Layer w10: X10.2 1361.89,2705 J3.11
NetJ3_19: J3.19 S2.3 | length 263.4
  Top Layer w10: J3.19 1670.12,2206.14 S2.3
NetJ3_22: J3.22 X8.2 | length 233.6
  Top Layer w10: X8.2 1305,2580 1348.67,2536.33 1478.78,2536.33 J3.22
NetJ5_1: J5.1 NJ1.6 NJ2.6 | length 2632.3
  Top Layer w25: v1(915,3810) 920,3815 v2(920,4225) v2(920,4915)
  Bottom Layer w25: J5.1 v1(915,3810) ; v2(920,4225) NJ1.6@1525,4225 ; v2(920,4915) 1210,4915 NJ2.6
NetJ6_uRX: J6.uRX R25.1 | length 415.8
  Top Layer w10: R25.1 1512.83,1075 J6.uRX
NetJ6_uTX: J6.uTX R24.1 | length 205.3
  Top Layer w10: R24.1 1349.13,845 J6.uTX
NetNJ1_4: NJ1.4 NJ2.4 | length 2360
  Top Layer w25: v2(870,3620) 870,5145 v2(870,5140)
  Bottom Layer w25: v2@870,3625.2 NJ1.4 ; v2(870,5140) 870,5145 NJ2.4@1290,5145
NetR1_2: R1.2 U1.8 | length 88.7
  Top Layer w15: U1.8 R1.2@370,4995
NetR2_1: R2.1 X2.1 | length 54.9
  Top Layer w10: R2.1 X2.1
NetR4_1: R4.1 X3.1 | length 54.9
  Top Layer w10: R4.1 X3.1
NetR5_2: R5.2 U2.8 | length 98.7
  Top Layer w15: U2.8 R5.2@120,5005
NetR6_1: R6.1 X4.1 | length 54.9
  Top Layer w10: R6.1 X4.1
NetR8_1: R8.1 X5.1 | length 54.9
  Top Layer w10: R8.1 X5.1
NetR14_1: R14.1 S2.1 | length 80.1
  Top Layer w10: R14.1 1625,1905.2 S2.1
NetR15_1: R15.1 X6.1 | length 54.9
  Top Layer w10: R15.1 X6.1
NetR19_1: R19.1 S1.3 | length 106.1
  Top Layer w15: S1.3 R19.1@753.23,5039.09
NetR20_1: R20.1 S1.1 | length 81.2
  Top Layer w15: R20.1 S1.1@660,4683.74
NetR21_1: R21.1 U7.1 U7.2 | length 123.2
  Top Layer w10: U7.1 U7.2 1050,2892.56 R21.1
NetR23_1: R23.1 X7.1 | length 60
  Top Layer w20: X7.1 R23.1
NetR26_1: R26.1 R31.2 X8.1 | length 114.9
  Top Layer w10: R31.2 R26.1
  Top Layer w20: R26.1 X8.1
NetR27_2: R27.2 U8.5 | length 134
  Top Layer w10: U8.5 1627.4,2717.4 1645,2735 1645,2807.44 R27.2
NetR29_1: R29.1 R33.2 X10.1 | length 137.7
  Top Layer w10: X10.1 1267.56,2760.12 R33.2
  Top Layer w20: R29.1 X10.1
NetR30_1: R30.1 U7.6 U7.7 | length 121.1
  Top Layer w10: R30.1 U7.7 U7.6
NJTRST: J4.10 U4.56 | length 943.2
  Top Layer w10: U4.56 454.47,1142.94 454.47,934.15 436,915.67 436,565.15 454.47,546.67 454.47,329.33 428.28,303.14 428.28,271.72 J4.10
NRST: C8.2 R7.2 SWM2.1 U4.7 | length 2246.1
  Top Layer w10: v1(605,1465) 605,1383.13 646.97,1341.16 690.69,1341.16 U4.7 ; v1(1110,1530) 1110,1080 1070,1040 1070,525 1100,495 1117.44,495 C8.2 R7.2 1137.44,152.56 SWM2.1
  Bottom Layer w10: v1(605,1465) 606.01,1465 669,1527.99 669,1529 670,1530 v1(1110,1530)
OSC1: C13.1 U4.5 X1.1 | length 330.5
  Top Layer w10: U4.5 878.9,1301.1 X1.1
OSC2: C14.1 U4.6 X1.2 | length 318.2
  Top Layer w10: U4.6 908.66,1320.79 X1.2
REGEN: C25.1 D7.2 R29.2 U7.5 | length 1144.7
  Top Layer w10: v1(860,2705) 850,2715 850,3115 855,3120 v1(860,3120) ; D7.2 1047.4,2682.4 v1(1070,2705) ; v1(1150,3120) U7.5 1166.26,3187.56 C25.1
  Top Layer w15: v1(1070,2705) R29.2
  Bottom Layer w10: v1(860,2705) v1(1070,2705) ; v1(860,3120) v1(1150,3120)
REGEN_UC: C24.1 R30.2 R32.2 U4.22 | length 2415
  Top Layer w10: U4.22 514.21,1784.21 v1(525,1795) ; v1(730,1810) 730,1930 741,1941 741,3022.99 731,3032.99 731,3057.01 760,3086.01 v1(760,3330) ; v1(1050,3335) R30.2 1100,3297.56 R32.2 C24.1
  Bottom Layer w10: v1(525,1795) 520,1795 535,1810 v1(730,1810) ; v1(760,3330) 765,3335 v1(1050,3335)
REVERSE: D10.1 J3.8 Q3.3 | length 356.8
  Top Layer w10: J3.8 1373.03,2366.7 1584.37,2366.7 D10.1@1593.66,2357.4
  Top Layer w20: Q3.3 1291.06,2369.72 J3.8
REVERSE_UC: Q3.1 R36.2 U4.28 | length 1563.2
  Top Layer w10: v1(395,1975) 395,1960 396.1,1958.9 U4.28 ; v1(860,1975) v1(860,2370) ; v1(1055,2370) 1102.56,2370 R36.2
  Top Layer w20: R36.2 1168.82,2367.56 Q3.1
  Bottom Layer w10: v1(395,1975) 437.11,1975 446.11,1966 851,1966 v1(860,1975) ; v1(860,2370) v1(1055,2370)
RXCANG: U1.4 U4.61 | length 4068.3
  Top Layer w10: 520,4627.56 530,4617.56 v1(530,4425) ; U4.61 v1@553.58,1523.58 ; v1@795,1620 v1(795,1630) ; v1@795,1625 812,1642 812,4413 v1(800,4425)
  Top Layer w15: 520,4627.56 U1.4
  Bottom Layer w10: v1(530,4425) v1(800,4425) ; v1(555,1525) 555,1535 650,1630 805,1630 795,1620 v1(795,1630)
RXCANL: U2.4 U4.33 | length 3702.3
  Top Layer w10: v1(65,1530) 59,1530 54,1535 54,4399 v1(65,4410) ; U4.33 272.64,1517.64 v1(295,1540) ; 270,4622.56 280,4612.56 v1(280,4415)
  Top Layer w15: 270,4622.56 U2.4
  Bottom Layer w10: v1(65,1530) 285,1530 v1(295,1540) ; v1(65,4410) 60,4415 v1(280,4415)
SCL: R16.2 U4.58 U5.6 | length 884.6
  Top Layer w10: v1(475,690) 465,700 465,736.01 494.53,765.54 U4.58 ; R16.2 637.44,680 U5.6 v1(735,680)
  Bottom Layer w10: v1(475,690) 485,680 v1(735,680)
SDA: R17.2 U4.59 U5.5 | length 812.9
  Top Layer w10: v1(500,730) 510,730 514.21,734.21 U4.59 ; R17.2 642.44,730 U5.5 v1(735,730)
  Bottom Layer w10: v1(500,730) v1(735,730)
SERIAL-IN: R4.2 U10.13 | length 995.2
  Top Layer w10: U10.13 655,2240 670,2225 670,1844.75 663,1837.75 663,1788 v1(650,1775) ; v1(1065,1720) R4.2
  Bottom Layer w10: v1(650,1775) 1010,1775 v1(1065,1720)
SERIAL-IN_UC: U4.43 U10.12 | length 1389.3
  Top Layer w10: v1(170,2190) 170,1757.88 162,1749.88 162,1650.12 170,1642.12 170,1340 189.21,1320.79 U4.43 ; v1(550,2190) U10.12
  Bottom Layer w10: v1(170,2190) 253.99,2190 267.99,2204 292.01,2204 306.01,2190 v1(550,2190)
SERIAL-OUT: R2.2 U10.14 | length 1098.8
  Top Layer w10: U10.14 645,2290 690,2245 690,1837.88 682,1829.88 682,1790.12 690,1782.12 v1@690,1745 ; v1(1065,1605) R2.2
  Bottom Layer w10: v1(680,1745) 955,1745 1065,1635 v1(1065,1605)
SERIAL-OUT_UC: U4.42 U10.11 | length 1267.6
  Top Layer w10: v1(200,2135) 189,2124 189,1750.01 181,1742.01 181,1657.99 189,1649.99 189,1347.87 196.4,1340.47 U4.42 ; v1(550,2135) 555,2140 U10.11
  Bottom Layer w10: v1(200,2135) v1(550,2135)
SPPLUSE: R14.2 U4.57 | length 2817.1
  Top Layer w10: v1(465,790) 465,795 474.84,804.84 U4.57 ; v1(1575,1765) 1617.56,1765 R14.2 ; v1(1695,850) 1775,930 v1(1775,1765)
  Bottom Layer w10: v1(465,790) 469,786 1311,786 1375,850 v1(1695,850) ; v1(1575,1765) v1(1775,1765)
TERM_EN: R20.2 U4.8 | length 3586.3
  Top Layer w10: v1(640,1540) 630,1530 630,1481.01 634,1477.01 634,1452.99 630,1448.99 630,1385 654.84,1360.16 U4.8 ; v1(660,4505) R20.2 ; v1(830,1565) 831,1566 v1@831,4504
  Bottom Layer w10: v1(640,1540) 665,1565 v1(830,1565) ; v1(660,4505) v1(830,4505)
THRENABLE: D9.2 R8.2 U4.25 | length 959.8
  Top Layer w10: U4.25 455,1596.54 455,1890 v1(480,1915) ; v1(980,1920) 982.6,1917.4 D9.2 1089.84,1917.4 R8.2
  Bottom Layer w10: v1(480,1915) 485,1920 v1(980,1920)
THROTTLE: C21.1 D7.1 R26.2 U7.3 | length 1129.6
  Top Layer w10: v1(860,2585) 860,2663.99 889,2692.99 889,2717.01 869,2737.01 869,3004 v1(880,3015) ; D7.1 1042.4,2607.6 v1(1070,2580) R26.2 ; v1(1100,3010) U7.3 1100,2887.44 C21.1
  Bottom Layer w10: v1(860,2585) 855,2580 v1(1070,2580) ; v1(880,3015) 1090,3015 1100,3005 v1(1100,3010)
THROTTLE_UC: C20.1 R21.2 R22.2 U4.21 | length 1888.1
  Top Layer w10: U4.21 533.9,1703.9 v1(545,1715) ; v1(705,2765) 720,2750 720,1946.87 711,1937.87 711,1832.01 701,1822.01 701,1797.99 720,1778.99 v1(720,1715) ; R21.2 1095,2832.44 R22.2 C20.1 v1(1060,2765)
  Bottom Layer w10: v1(545,1715) v1(720,1715) ; v1(705,2765) v1(1060,2765)
TXCANG: U1.1 U4.62 | length 4126.8
  Top Layer w10: v1(360,4385) 360,4617.56 370,4627.56 ; U4.62 572.58,1144.31 572.58,1482.58 v1(595,1505) ; v1(755,1600) 755,1645 793,1683 793,4362 v1(770,4385)
  Top Layer w15: 370,4627.56 U1.1
  Bottom Layer w10: v1(360,4385) v1(770,4385) ; v1(595,1505) 595,1545 650,1600 v1(755,1600)
TXCANL: U2.1 U4.34 | length 3607.2
  Top Layer w10: v1(35,1500) v1(35,4445) ; v1(110,4445) 110,4612.56 120,4622.56 ; U4.34 v1@302.95,1497.95
  Top Layer w15: 120,4622.56 U2.1
  Bottom Layer w10: v1(35,1500) v1(305,1500) ; v1(35,4445) v1(110,4445)
VCAP_1: C12.1 U4.31 | length 143.8
  Top Layer w10: C12.1@312.56,1730 337.05,1705.51 U4.31
VCAP_2: C11.1 U4.47 | length 163.1
  Top Layer w10: C11.1 105,1225 122.05,1242.05 U4.47
pads on no net: J3.0 J3.12 J3.13 J3.20 J3.21 J3.25 J5.6 J5.7 J5.8 J5.9 J6.0 NJ1.7 NJ1.8 NJ2.7 NJ2.8 SWM1.3 SWM1.4 SWM2.3 SWM2.4 U4.9 U4.10 U4.11 U4.14 U4.15 U4.16 U4.17 U4.20 U4.35 U4.36 U4.37 U4.38 U4.39 U4.40 U4.41 U4.44 U4.45 U4.51 U4.52 U4.53 U5.1 U5.2 U5.3 U10.7 U10.8 U10.9 U10.10

## Polygon pours and split planes (outlines as drawn)
+3.3V on Top Layer "Bottom Layer-No Net" (solid, remove dead copper, pour order 4): 25,5975 1775,5975 1775,25 25,25
+VCAN on Top Layer "Bottom Layer-No Net" (solid, remove dead copper, pour order 2): 600,5185 600,5295 700,5295 700,5400 1050,5400 1050,5675 950,5675 950,5975 1775,5975 1780,5970 1780,3445 1050,3445 1050,5185
GND on Bottom Layer "Bottom Layer-No Net" (solid, remove dead copper, pour order 6): 25,5975 1775,5975 1775,25 25,25

## Silkscreen, mask and mechanical layers (free items; w line width, h text height)
Top Overlay:
  text "fullCURRENT control 2.0" at 85,2550 h75 r90
  text "Jonathan Nutzmann" at 150,2550 h75 r90
  text "Full Steam Engineering" at 215,2550 h75 r90
  text "FSE" at 215,2055 h300 r90
  text "RESET" at 1415,405 h40 r90
  text "BOOT" at 1095,400 h40 r90
Mechanical 1:
  the board outline again, w10